# Altium PCB control-cluster-test.PcbDoc
Units mm, origin at the board's own origin, x right, y up, seen from the top; angles counter-clockwise.
Board outline 50.8 x 101.6 mm, 2 copper layers (Top Layer, Bottom Layer); 34 components, 24 nets, 140 pads, 5 vias.
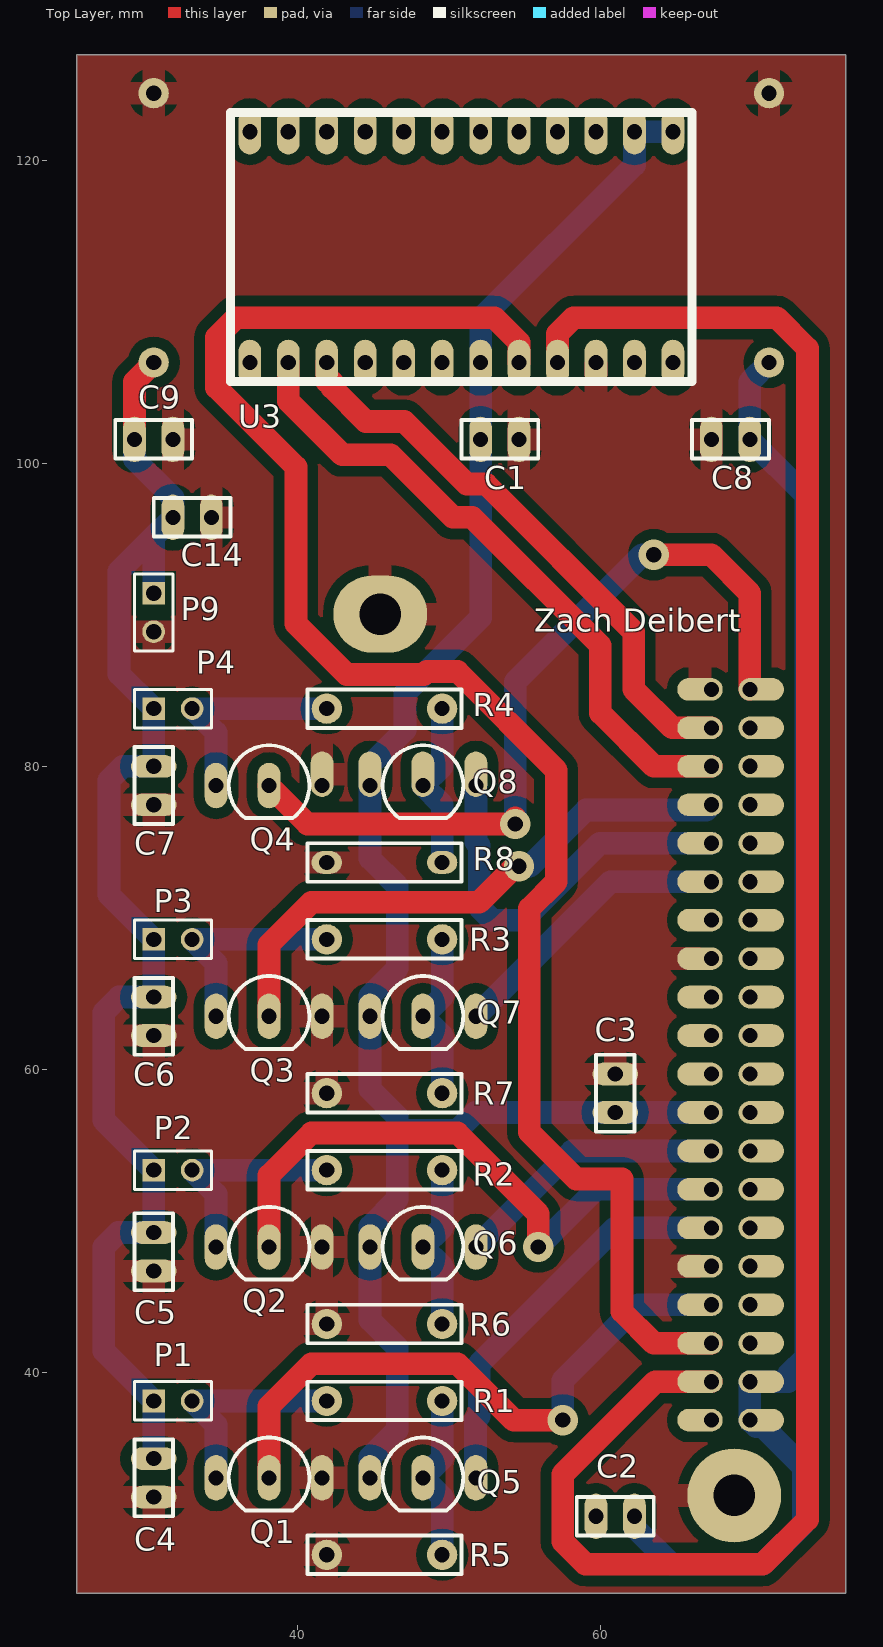
[diagram p0: Top Layer view]
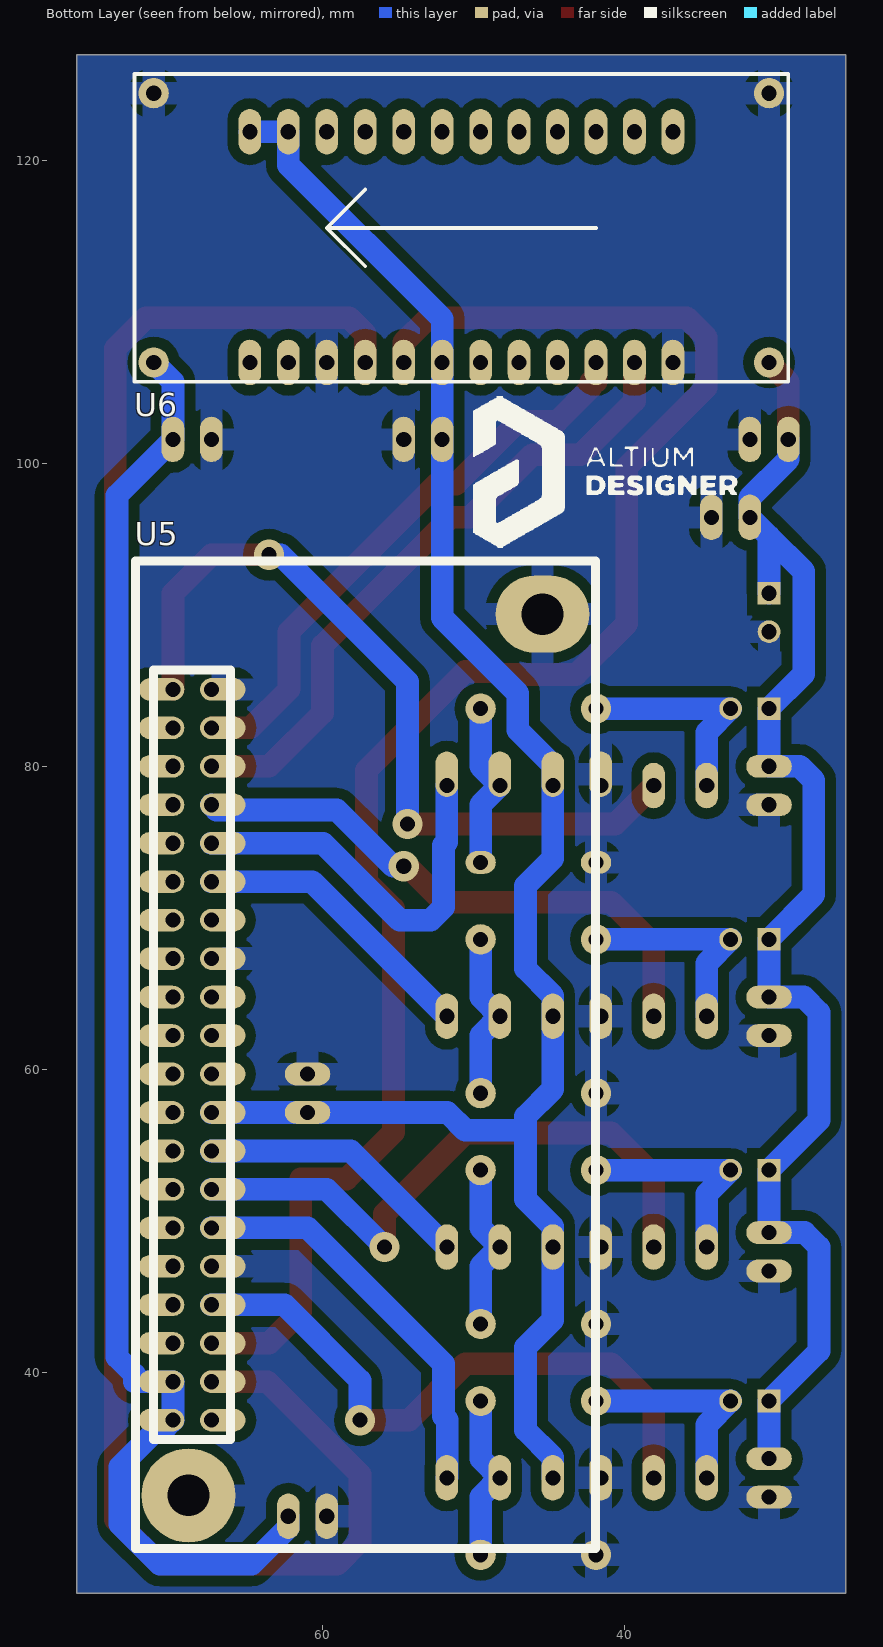
[diagram p1: Bottom Layer view, seen from below]

## Layer stack, top to bottom
Top Solder: solder mask 0.0102, Solder Resist, Dk 3.5
Top Layer: signal copper 0.0356
Dielectric 1: dielectric 0.32, FR-4, Dk 4.8
Bottom Layer: signal copper 0.0356
Bottom Solder: solder mask 0.0102, Solder Resist, Dk 3.5

## Board outline
25.4,25.4 76.2,25.4 76.2,127 25.4,127

## Design rules (kind name [scope] priority, off if disabled: settings)
Clearance [All] p1: gap=0.7 ignorepadtopadclearanceinfootprint=FALSE
ComponentClearance [All] p1: gap=0.1 collisioncheckmode=3 verticalgap=0.254 showdistances=FALSE
HoleSize [All] p1: absolutevalues=TRUE maxlimit=3 minlimit=1 maxpercent=80.000 minpercent=20.000
MinimumSolderMaskSliver [All] p1: minsoldermaskwidth=0.1
PlaneClearance [All] p1: clearance=0.7
PlaneConnect [All] p1: planeconnectstyle=Relief reliefexpansion=0.5 reliefentries=4 reliefconductorwidth=1.5 reliefairgap=0.7
PolygonConnect [All] p1: connectstyle=Relief reliefconductorwidth=1.5 reliefentries=4 polygonreliefangle="90 Angle" airgapwidth=0.7
RoutingVias [All] p1: holewidth=1 width=3 viastyle="Through Hole" minholewidth=1 minwidth=1.5 maxholewidth=2 maxwidth=3
SilkToSilkClearance [All] p1 off: silktosilkclearance=0.01
SilkToSolderMaskClearance [IsPad] p1 off: minsilkscreentomaskgap=0.254 clearancetoexposedcopper=TRUE
SolderMaskExpansion [All] p1: expansion=0.1
UnRoutedNet [All] p1: checkbadconnections=TRUE
Width [All] p1: maxlimit=1.5 minlimit=0.5 preferedwidth=0.7 minimp=50.000000 maximp=50.000000 favimp=50.000000
22 further rules are at their usual default settings.

## Components (designator, comment, footprint, x,y, rotation, side; value= is the part's Value field where it differs from the comment)
C1 "0.1uF" CAPACITOR 53.34,101.6 r180 top
C2 "0.1uF" CAPACITOR 60.96,30.48 r0 top
C3 "0.1uF" CAPACITOR 60.96,58.42 r270 top
C4 "1uF" CAPACITOR 30.48,33.02 r90 top
C5 "1uF" CAPACITOR 30.48,47.95 r90 top
C6 "1uF" CAPACITOR 30.48,63.5 r90 top
C7 "1uF" CAPACITOR 30.48,78.74 r90 top
C8 "0.1uF" CAPACITOR 68.58,101.6 r0 top
C9 "0.1uF" CAPACITOR 30.48,101.6 r180 top
C14 "1uF" CAPACITOR 33.02,96.45 r180 top
P1 "Header 2" HDR1X2 30.48,38.1 r0 top
P2 "Header 2" HDR1X2 30.48,53.34 r0 top
P3 "Header 2" HDR1X2 30.48,68.58 r0 top
P4 "Header 2" HDR1X2 30.48,83.82 r0 top
P9 "Header 2" HDR1X2 30.48,91.44 r270 top
Q1 "PN2222A" PN2222A#1 38.1,33.02 r180 top
Q2 "PN2222A" PN2222A#1 38.1,48.26 r180 top
Q3 "PN2222A" PN2222A#1 38.1,63.5 r180 top
Q4 "PN2222A" PN2222A#2 38.1,78.74 r180 top
Q5 "PN2222A" PN2222A#1 48.26,33.02 r180 top
Q6 "PN2222A" PN2222A#1 48.26,48.26 r180 top
Q7 "PN2222A" PN2222A#1 48.26,63.5 r180 top
Q8 "PN2222A" PN2222A#3 48.26,78.74 r180 top
R1 "200k" RESISTOR#1 45.72,38.1 r180 top
R2 "200k" RESISTOR#1 45.72,53.34 r180 top
R3 "200k" RESISTOR#1 45.72,68.58 r180 top
R4 "200k" RESISTOR#1 45.72,83.82 r180 top
R5 "160k" RESISTOR#1 45.72,27.94 r0 top
R6 "160k" RESISTOR#1 45.72,43.18 r0 top
R7 "160k" RESISTOR#1 45.72,58.42 r0 top
R8 "160k" RESISTOR#2 45.72,73.66 r0 top
U3 "STEVAL-MKI179V1" STEVAL 50.8,114.3 r180 top
U5 "RASPBERRY-PI" RASPBERRY-PI 68.58,60.96 r0 bottom
U6 "BUCK_CONVERTER" BUCK_CONVERTER 50.8,115.57 r0 bottom

## Footprints (in the part's own frame and the unit in brackets; to place one, negate y for a bottom-side part, rotate by r counter-clockwise, add the part's x,y. Pads: shape width x height; smd on the part's side, far side on the other; paste and mask are expansions set on the pad)
BUCK_CONVERTER [mm]
  round 2 hole 1: 1(-20.32,8.89) 2(-20.32,-8.89) 3(20.32,8.89) 4(20.32,-8.89)
  silkscreen extent -21.59,-10.16 21.59,10.16
CAPACITOR [mm]
  oval 1.5x3 hole 1: 1(-1.27,0) 2(1.27,0)
  silkscreen extent -2.54,-1.27 2.54,1.27
HDR1X2 [mm] "Connector; Header; 2 Position"
  rect 1.5x1.5 hole 1: 1(0,0)
  round 1.5 hole 1: 2(2.54,0)
  silkscreen extent -1.27,-1.27 3.81,1.27
PN2222A#1 [mm]
  oval 1.5x3 hole 1: 1(-3.5,0) 2(0,0) 3(3.5,0)
  silkscreen extent -2.66,-2.66 2.66,2.15
PN2222A#2 [mm]
  oval 1.5x3 hole 1 copper offset 0,-0.75: 1(-3.5,0)
  oval 1.5x3 hole 1: 2(0,0) 3(3.5,0)
  silkscreen extent -2.66,-2.66 2.66,2.15
PN2222A#3 [mm]
  oval 1.5x3 hole 1 copper offset 0,-0.75: 1(-3.5,0) 2(0,0) 3(3.5,0)
  silkscreen extent -2.66,-2.66 2.66,2.15
RASPBERRY-PI [mm]
  oval 3x1.5 hole 1 copper offset -0.75,0: 1(-1.27,24.13) 3(-1.27,21.59) 5(-1.27,19.05) 7(-1.27,16.51) 9(-1.27,13.97) 11(-1.27,11.43) 13(-1.27,8.89) 15(-1.27,6.35) 17(-1.27,3.81) 19(-1.27,1.27) 21(-1.27,-1.27) 23(-1.27,-3.81) 25(-1.27,-6.35) 27(-1.27,-8.89) 29(-1.27,-11.43) 31(-1.27,-13.97) 33(-1.27,-16.51) 35(-1.27,-19.05) 37(-1.27,-21.59) 39(-1.27,-24.13)
  oval 3x1.5 hole 1 copper offset 0.75,0: 2(1.27,24.13) 4(1.27,21.59) 6(1.27,19.05) 8(1.27,16.51) 10(1.27,13.97) 12(1.27,11.43) 14(1.27,8.89) 16(1.27,6.35) 18(1.27,3.81) 20(1.27,1.27) 22(1.27,-1.27) 24(1.27,-3.81) 26(1.27,-6.35) 28(1.27,-8.89) 30(1.27,-11.43) 32(1.27,-13.97) 34(1.27,-16.51) 36(1.27,-19.05) 38(1.27,-21.59) 40(1.27,-24.13)
  oval 6.2x5.08 hole 2.75: HOLE(-23.14,-29.1)
  round 6.2 hole 2.75: HOLE(0.24,29.1)
  silkscreen extent -26.64,-32.6 3.74,32.6
RESISTOR#1 [mm]
  round 2 hole 1: 1(-3.81,0) 2(3.81,0)
  silkscreen extent -5.08,-1.27 5.08,1.27
RESISTOR#2 [mm]
  oval 2x1.5 hole 1: 1(-3.81,0) 2(3.81,0)
  silkscreen extent -5.08,-1.27 5.08,1.27
STEVAL [mm]
  oval 1.5x3 hole 1: 1(-13.97,-7.62) 2(-11.43,-7.62) 3(-8.89,-7.62) 4(-6.35,-7.62) 5(-3.81,-7.62) 6(-1.27,-7.62) 7(1.27,-7.62) 8(3.81,-7.62) 9(6.35,-7.62) 10(8.89,-7.62) 11(11.43,-7.62) 12(13.97,-7.62) 13(13.97,7.62) 14(11.43,7.62) 15(8.89,7.62) 16(6.35,7.62) 17(3.81,7.62) 18(1.27,7.62) 19(-1.27,7.62) 20(-3.81,7.62) 21(-6.35,7.62) 22(-8.89,7.62) 23(-11.43,7.62) 24(-13.97,7.62)
  silkscreen extent -15.24,-8.89 15.24,8.89

## Part data
C1 C2 C3 C4 C5 C6 C7 C8 C9 C14: library part CAPACITOR
P1 P2 P3 P4 P9: "Header, 2-Pin", LatestRevisionDate=17-Jul-2002, LatestRevisionNote="Re-released for DXP Platform.", Publisher="Altium Limited"
R1 R2 R3 R4 R5 R6 R7 R8: library part RESISTOR
U6: ComponentLink1Description=amazon, ComponentLink1URL=https://www.amazon.com/MCIGICM-step-down-Converter-3-0-40V-1-5-35V/dp/B06XZ1DKF2

## Via types
v1: diameter 2, hole 1, Top Layer to Bottom Layer, 5 vias

## Nets (pads, with @x,y where several pads share a name; then routed paths per layer and width w, separated by ;. In a path a pad name is that pad's centre, name@x,y a point inside that pad or via, vN(x,y) a via of type N, cw(c..) or ccw(c..) an arc to the next point about the centre after c; other vN are vias at no path point)
+3V3: C1.2 C3.2 Q5.3 Q6.3 Q7.3 Q8.3 U3.1 U3.2 U3.19 U5.17 | length 124.4
  Bottom Layer w1.5: Q5.3 44.76,34.374 46.56,36.174 46.56,41.641 44.76,43.441 Q6.3 44.76,49.614 46.56,51.414 46.56,55.88 ; U3.1 U3.2 62.23,119.72 52.07,109.56 U3.19 C1.2 52.07,89.825 47.08,84.835 47.08,82.414 44.76,80.094 Q8.3 44.76,73.921 46.56,72.121 46.56,66.654 44.76,64.854 Q7.3 44.76,58.681 46.56,56.881 46.56,55.88 ; U5.17 C3.2 51.725,57.15 50.545,55.97 46.65,55.97 46.56,55.88
+5: C2.2 C8.2 U5.2 U5.4 U6.3 | length 97.5
  Bottom Layer w1.5: C2.2 62.23,29.733 64.653,27.31 70.705,27.31 73.37,29.975 73.37,33.745 70.705,36.41 70.27,36.41 U5.2 U5.4 72.39,39.37 72.39,39.839 73.55,40.999 73.55,97.9 C8.2 69.85,105.41 U6.3
+7V4: C4.2 C5.2 C6.2 C7.2 C9.2 C14.2 P1.1 P2.1 P3.1 P4.1 P9.1 U6.1 | length 91.9
  Top Layer w1.5: C9.2 29.21,105.41 U6.1
  Bottom Layer w1.5: C9.2 29.21,100.279 31.75,97.739 C14.2 30.48,95.18 ; C4.2 P1.1 27.178,41.402 27.178,48.26 28.138,49.22 C5.2 P2.1 27.178,56.642 27.178,63.754 28.194,64.77 C6.2 P3.1 27.53,71.53 27.53,79.092 28.448,80.01 C7.2 P4.1 28.194,86.106 28.194,92.894 30.48,95.18 ; P9.1 30.48,95.18
DET1: Q5.1 U5.11 | length 26.7
  Bottom Layer w1.5: Q5.1 51.73,33.05 51.73,36.835 51.98,37.085 51.98,40.55 60.96,49.53 U5.11
DET2: Q6.1 U5.15 | length 18.2
  Bottom Layer w1.5: Q6.1 58.11,54.61 U5.15
DET3: Q7.1 U5.29 | length 19.2
  Bottom Layer w1.5: Q7.1 60.65,72.39 U5.29
DET4: Q8.1 U5.31 | length 25.9
  Bottom Layer w1.5: Q8.1 51.76,75.011 51.98,74.791 51.98,70.702 52.832,69.85 54.864,69.85 59.944,74.93 U5.31
FIRE1: Q1.2 U5.7 | length 41.3
  Top Layer w1.5: Q1.2 38.1,37.755 40.895,40.55 50.545,40.55 54.265,36.83 v1(57.49,36.83)
  Bottom Layer w1.5: v1(57.49,36.83) 57.49,39.455 62.485,44.45 U5.7
FIRE2: Q2.2 U5.13 | length 41.1
  Top Layer w1.5: Q2.2 38.1,52.995 40.895,55.79 50.545,55.79 55.88,50.455 v1(55.88,48.26)
  Bottom Layer w1.5: v1(55.88,48.26) 59.69,52.07 U5.13
FIRE3: Q3.2 U5.33 | length 37.8
  Top Layer w1.5: Q3.2 38.1,68.235 40.895,71.03 51.98,71.03 54.356,73.406 v1(54.61,73.406)
  Bottom Layer w1.5: v1(54.61,73.406) 55.309,73.406 59.033,77.13 66.97,77.13 U5.33
FIRE4: Q4.2 U5.40 | length 53.5
  Top Layer w1.5: Q4.2 40.64,76.2 v1(54.356,76.2) v1@54.356,76.603 ; v1(63.5,93.98) 67.31,93.98 69.85,91.44 U5.40
  Bottom Layer w1.5: v1(54.356,76.2) 54.356,85.598 62.738,93.98 v1(63.5,93.98)
GND: C1.1 C2.1 C3.1 C4.1 C5.1 C6.1 C7.1 C8.1 C9.1 C14.1 P9.2 Q1.1 Q2.1 Q3.1 Q4.1 R5.1 R6.1 R7.1 R8.1 U3.13 U3.22 U5.9 U5.25 U5.39 U5.HOLE U6.2 U6.4
INT1: U3.14 U5.35 | length 43.1
  Top Layer w1.5: U3.14 39.37,104.14 42.93,100.58 46.117,100.58 50.238,96.459 ; 50.238,96.45 51.517,96.45 59.979,87.989 59.979,83.531 63.5,80.01 U5.35
INT2: U3.15 U5.37 | length 38.6
  Top Layer w1.5: U3.15 41.91,105.41 42.25,105.41 42.25,105.019 44.489,102.78 47.029,102.78 51.159,98.65 52.429,98.65 62.179,88.9 62.179,85.09 64.719,82.55 U5.37
NetP1_2: P1.2 Q1.3 R1.2 | length 14.6
  Bottom Layer w1.5: Q1.3 34.6,36.52 P1.2 R1.2
NetP2_2: P2.2 Q2.3 R2.2 | length 14.6
  Bottom Layer w1.5: Q2.3 34.6,51.76 P2.2 R2.2
NetP3_2: P3.2 Q3.3 R3.2 | length 14.6
  Bottom Layer w1.5: Q3.3 34.6,67 P3.2 R3.2
NetP4_2: P4.2 Q4.3 R4.2 | length 14.6
  Bottom Layer w1.5: Q4.3 34.6,82.24 P4.2 R4.2
NetQ5_2: Q5.2 R1.1 R5.2 | length 11.2
  Bottom Layer w1.5: R5.2 49.53,31.75 Q5.2 49.53,34.29 R1.1
NetQ6_2: Q6.2 R2.1 R6.2 | length 11.2
  Bottom Layer w1.5: R6.2 49.53,46.99 Q6.2 49.53,49.53 R2.1
NetQ7_2: Q7.2 R3.1 R7.2 | length 11.2
  Bottom Layer w1.5: R7.2 49.53,62.23 Q7.2 49.53,64.77 R3.1
NetQ8_2: Q8.2 R4.1 R8.2 | length 11.2
  Bottom Layer w1.5: R8.2 49.53,77.47 Q8.2 49.53,80.01 R4.1
SCL: U3.20 U5.5 | length 112.5
  Top Layer w1.5: U3.20 54.6,106.69 54.6,108.011 52.981,109.63 35.919,109.63 34.63,108.341 34.63,105.019 39.878,99.771 39.878,89.419 43.227,86.07 48.315,86.07 48.515,86.27 50.545,86.27 57.06,79.755 57.06,72.391 55.29,70.621 55.29,55.847 58.387,52.75 61.41,52.75 61.41,44 63.5,41.91 U5.5
SDA: U3.21 U5.3 | length 131.8
  Top Layer w1.5: U3.21 57.15,108.573 58.207,109.63 71.635,109.63 73.66,107.605 73.66,30.265 70.705,27.31 58.999,27.31 57.49,28.819 57.49,33.256 63.604,39.37 U5.3
pads on no net: U3.3 U3.4 U3.5 U3.6 U3.7 U3.8 U3.9 U3.10 U3.11 U3.12 U3.16 U3.17 U3.18 U3.23 U3.24 U5.1 U5.6 U5.8 U5.10 U5.12 U5.14 U5.16 U5.18 U5.19 U5.20 U5.21 U5.22 U5.23 U5.24 U5.26 U5.27 U5.28 U5.30 U5.32 U5.34 U5.36 U5.38

## Polygon pours and split planes (outlines as drawn)
GND on Top Layer (solid, remove dead copper, pour order 2): 25.4,127 76.2,127 76.2,25.4 25.4,25.4
GND on Top Layer (solid, remove dead copper, pour order 4): 0,85.09
GND on Bottom Layer (solid, remove dead copper, pour order 6): 25.4,127 76.2,127 76.2,25.4 25.4,25.4

## Silkscreen, mask and mechanical layers (free items; w line width, h text height)
Top Overlay:
  text "Zach Deibert" at 55.626,88.9 h1.52
Bottom Overlay:
  drawing of 15 lines, arcs and shapes, not listed